# Altium PCB NewSpeedRadar_Board.PcbDoc (part 2 of 4)
Units mm, origin at the board's own origin, x right, y up, seen from the top; angles counter-clockwise.
Board outline 150 x 110 mm, 2 copper layers (Top Layer, Bottom Layer), stack 1.571 mm thick; 208 components, 164 nets, 788 pads, 782 vias.
Unrouted connection lines stored in the file: 231.
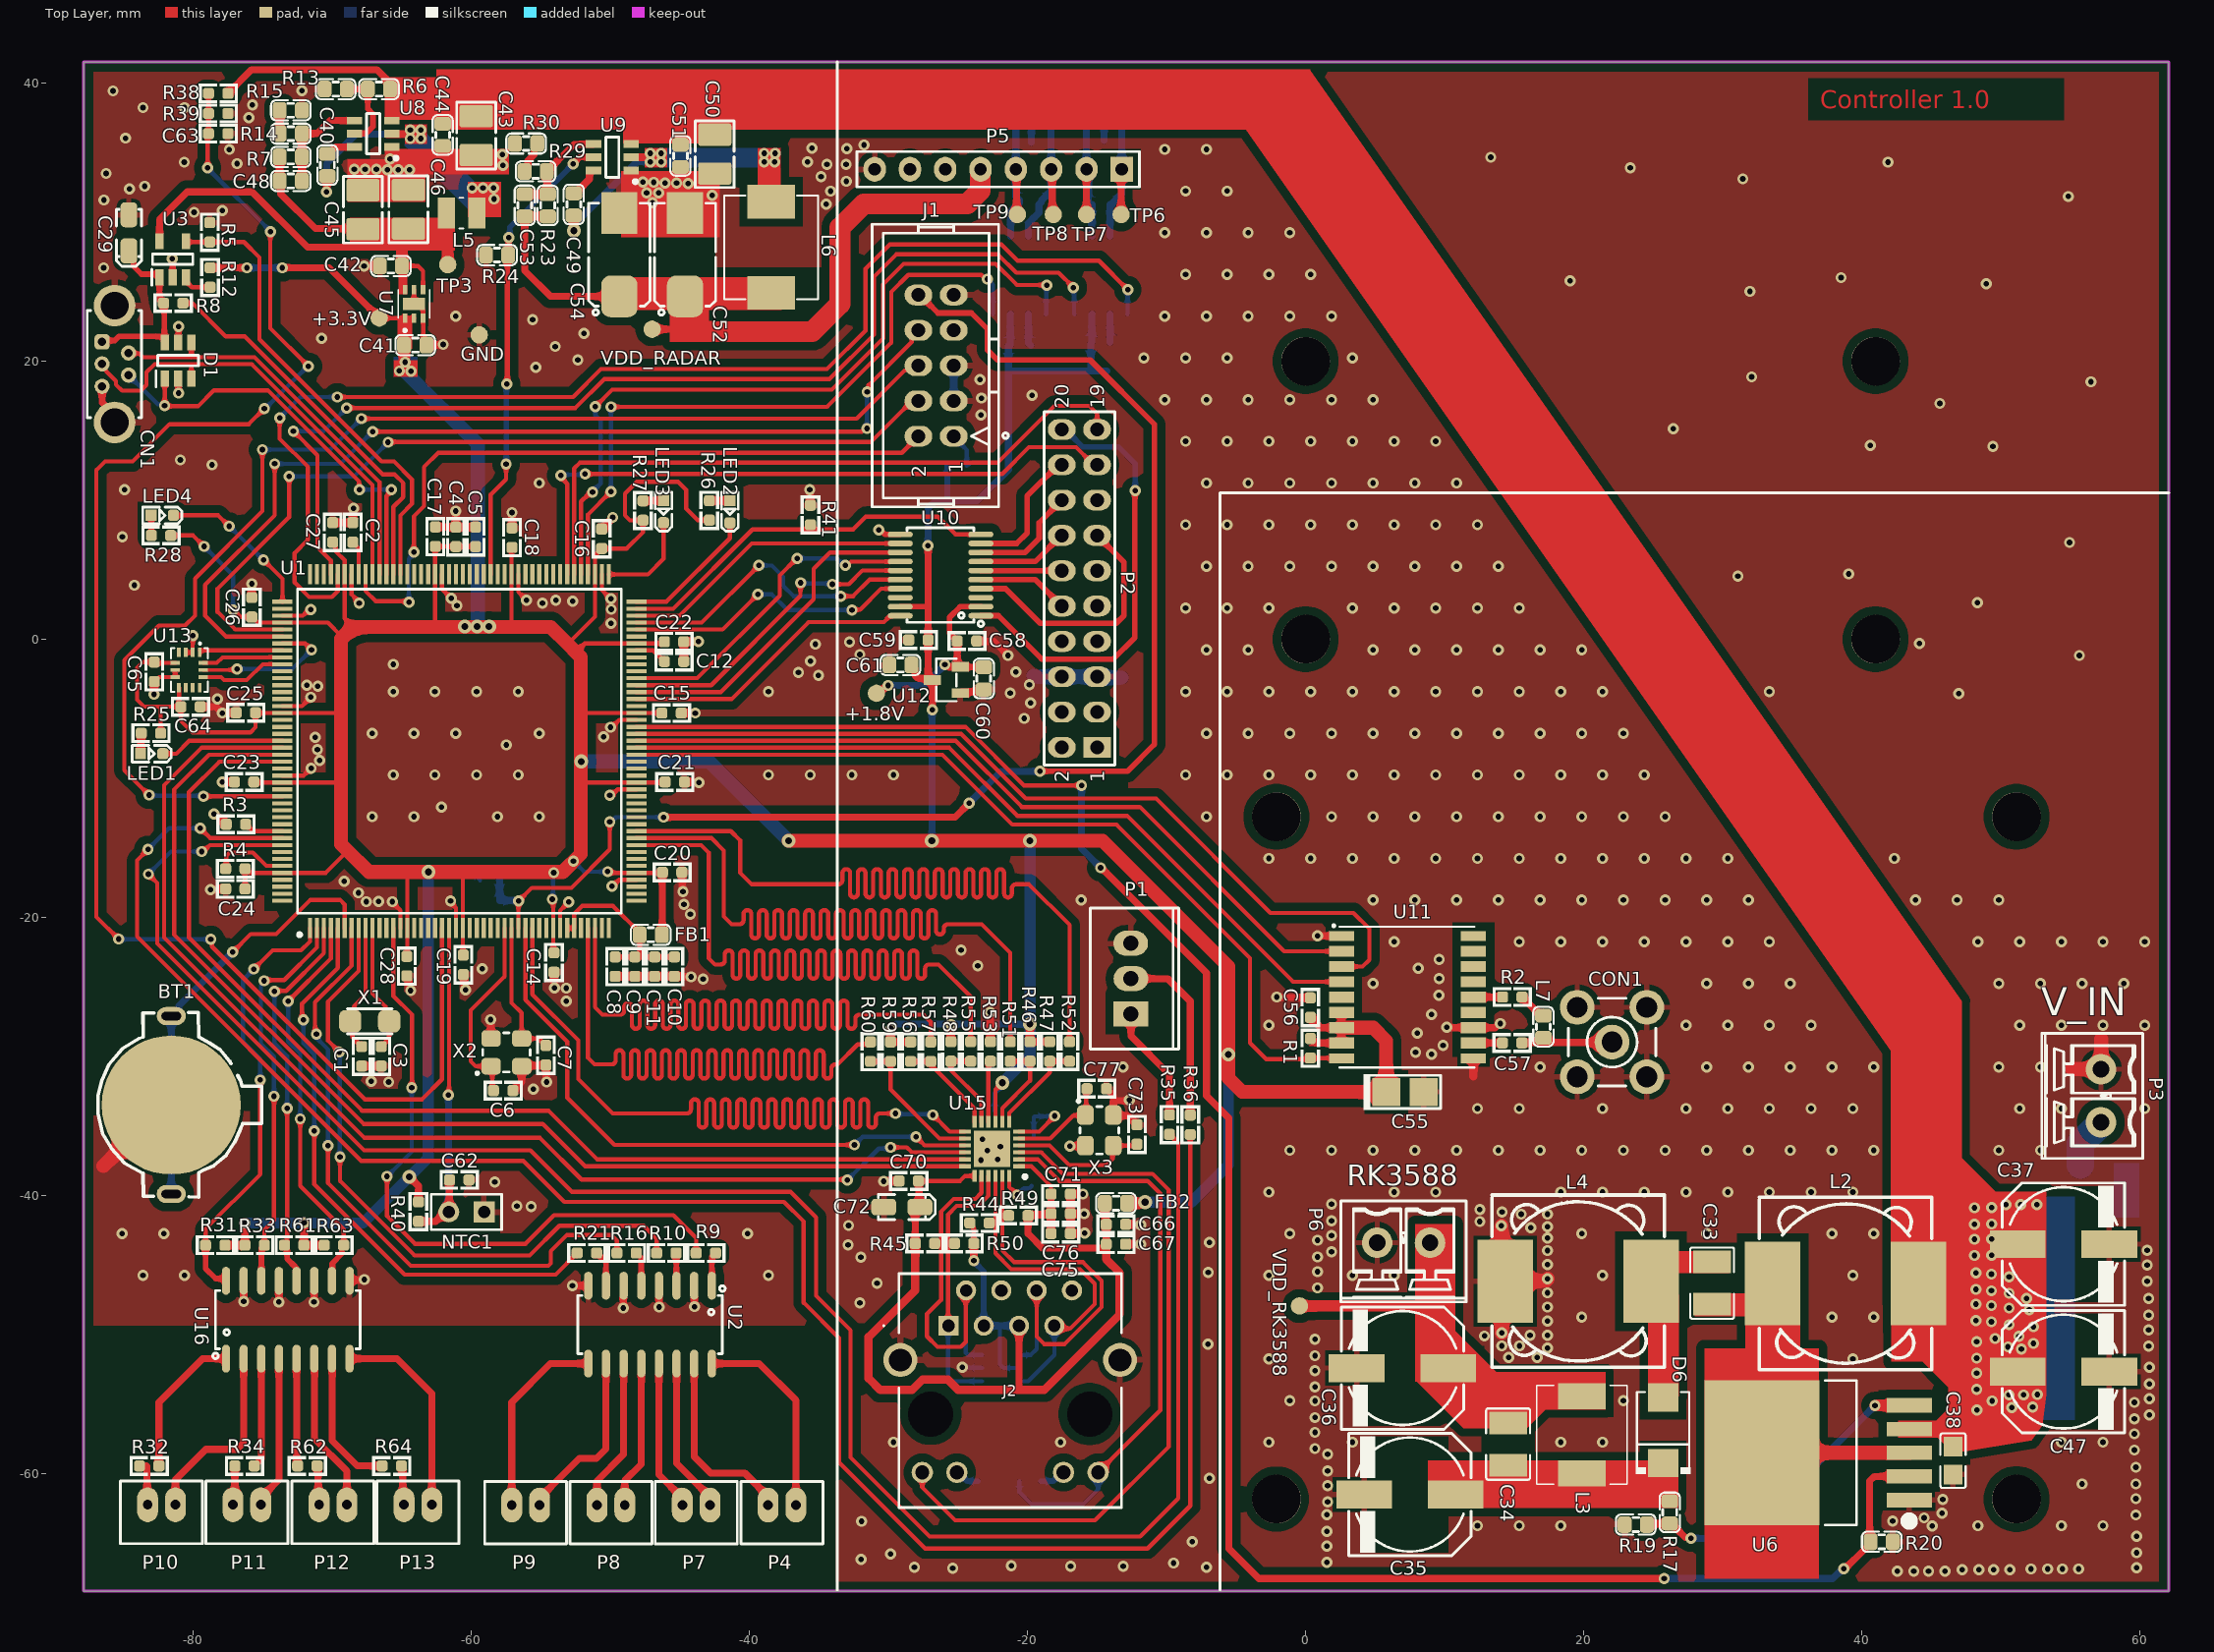
[diagram p0: Top Layer view]

## Via types
v1: diameter 0.8, hole 0.4, Top Layer to Bottom Layer, tented both sides, 480 vias
v2: diameter 0.8, hole 0.4, Top Layer to Bottom Layer, 288 vias
v3: diameter 1, hole 0.5, Top Layer to Bottom Layer, tented both sides, 14 vias

## Nets (pads, with @x,y where several pads share a name; then routed paths per layer and width w, separated by ;. In a path a pad name is that pad's centre, name@x,y a point inside that pad or via, vN(x,y) a via of type N, cw(c..) or ccw(c..) an arc to the next point about the centre after c; other vN are vias at no path point) (continued)
+5V: (continued)
  Top Layer w0.5: U3.5@-82.446,28.632 -82.446,30.183 -80.45,32.179 -75.791,32.179 -71.803,28.191 -65.913,28.191 C46.2@-64.974,29.131 ; R7.1@-73.8,34.694 C48.2@-73.8,32.967 -73.725,32.891 -73.725,32.028 -71.235,29.538 -67.853,29.538 C45.2@-67.815,29.499
  Top Layer w0.8: C42.2@-64.999,26.845 -64.999,28.337 ; C42.2@-64.986,26.693 C42.2@-64.986,26.845 ; -61.862,28.445 -61.818,28.445 -61.71,28.337 TP3.1@-61.71,26.947
+12V_RK3588: C34.2 C36.1 L3.2 P6.1 VDD_RK3588.1 | length 9.7
  Top Layer w0.8: VDD_RK3588.1@-0.445,-47.958 9.156,-47.958 9.232,-47.882
ADC4_1V8: P2.15
ADC_TEMP: C62.2 NTC1.2 R40.2 U1.21 | length 25.2
  Top Layer w0.3: v1(-61.659,-32.794) -61.622,-32.757 U1.21@-61.622,-20.779
  Top Layer w0.5: R40.2@-63.818,-41.876 -62.585,-41.876 -61.904,-41.195 NTC1.2@-61.634,-41.195 -61.608,-41.17 -61.608,-38.915 C62.2@-61.583,-38.89
  Bottom Layer w0.5: NTC1.2@-61.659,-41.17 v1(-61.659,-32.794)